# Altium PCB Layout.PcbDoc
Units mil, origin at the board's own origin, x right, y up, seen from the top; angles counter-clockwise.
Board outline 6225 x 3025 mil, 2 copper layers (Top Layer, Bottom Layer); 52 components, 49 nets, 203 pads, 6 vias.
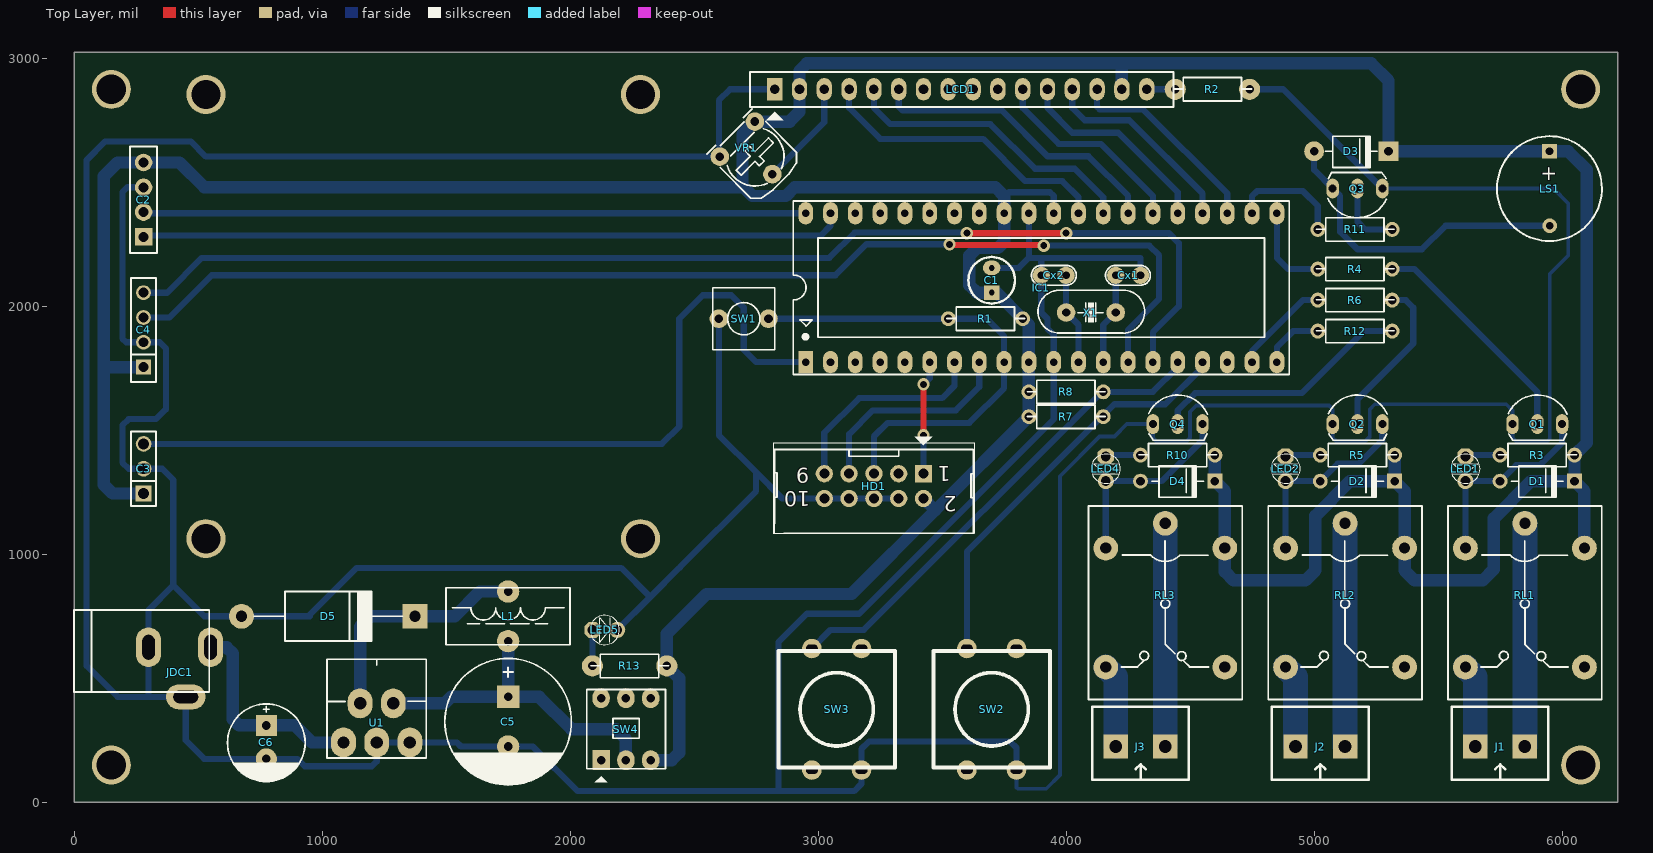
[diagram p0: Top Layer view]
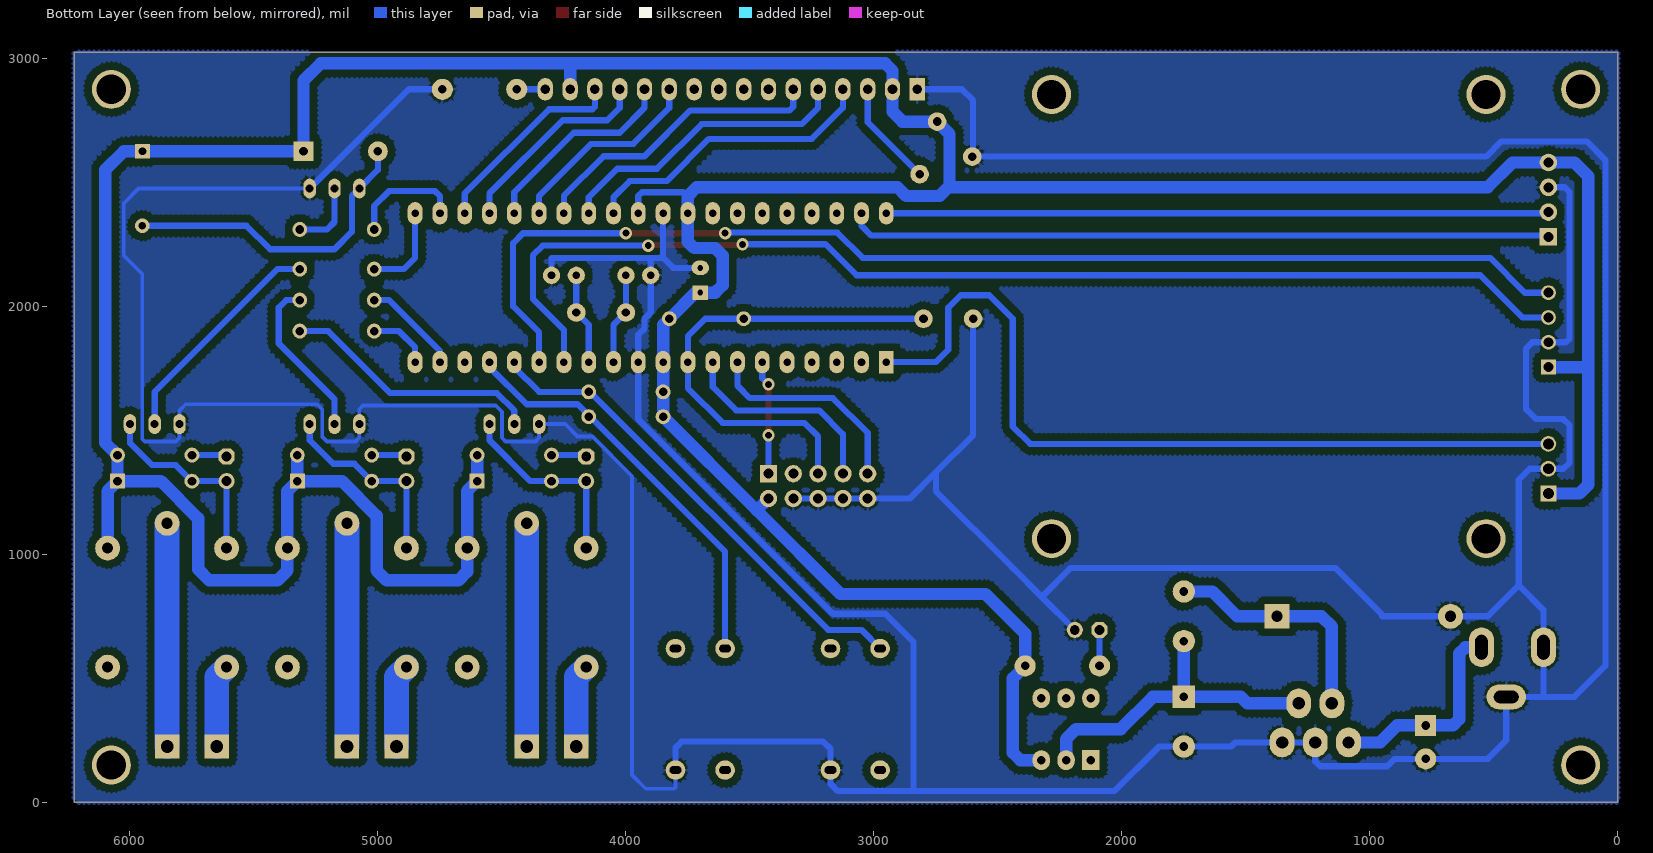
[diagram p1: Bottom Layer view, seen from below]
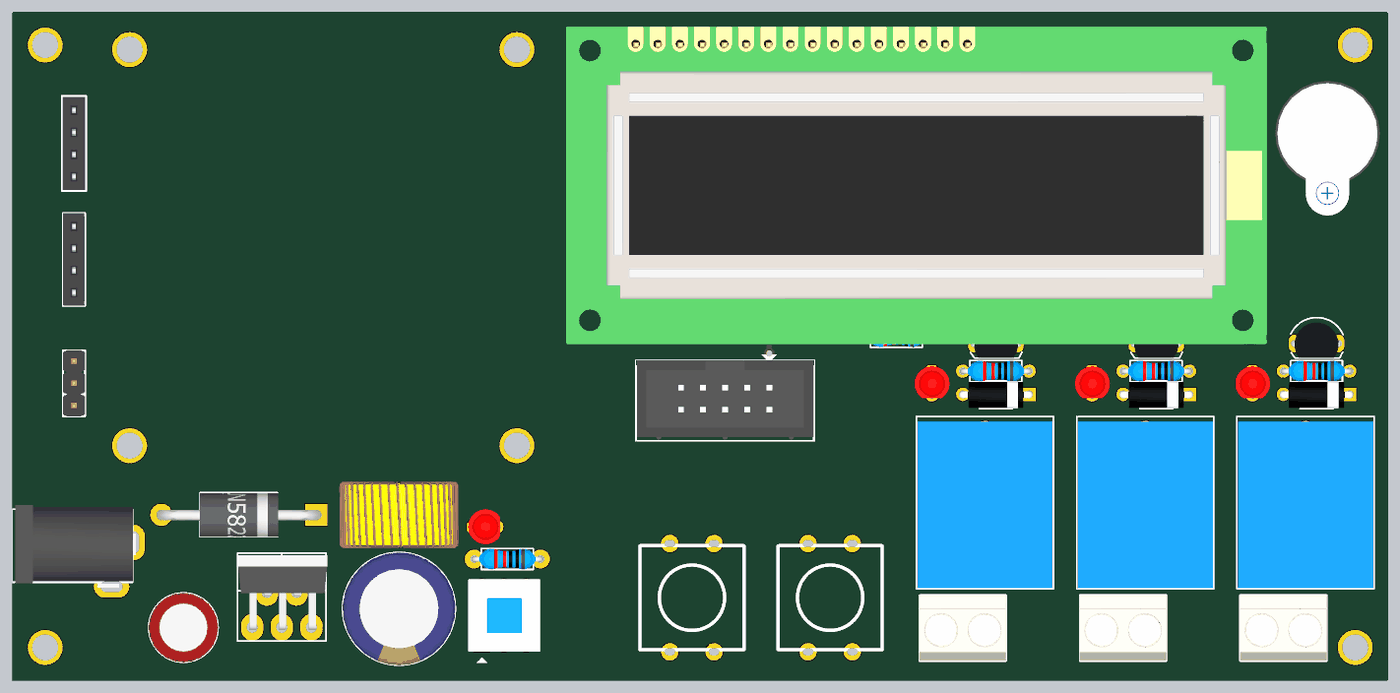
[diagram p2: 3D render of the assembled board from above, using the file's embedded part models]

## Layer stack, top to bottom
Top Solder: solder mask 0.4, Solder Resist, Dk 3.5
Top Layer: signal copper 1.4
Dielectric 1: dielectric 12.6, FR-4, Dk 4.8
Bottom Layer: signal copper 1.4
Bottom Solder: solder mask 0.4, Solder Resist, Dk 3.5

## Board outline
0,0 6225,0 6225,3025 0,3025

## Design rules (kind name [scope] priority, off if disabled: settings)
Clearance [All] p1: gap=30 ignorepadtopadclearanceinfootprint=FALSE
PolygonConnect [All] p1: connectstyle=Relief reliefconductorwidth=10 reliefentries=4 polygonreliefangle="90 Angle" airgapwidth=10
RoutingVias [All] p1: holewidth=28 width=50 viastyle="Through Hole" minholewidth=28 minwidth=50 maxholewidth=28 maxwidth=50
SolderMaskExpansion [All] p1: expansion=4
Width [All] p1: maxlimit=100 minlimit=15 preferedwidth=25
30 further rules are at their usual default settings.

## Components (designator, comment, footprint, x,y, rotation, side; value= is the part's Value field where it differs from the comment)
C1 "47u/16V" CA-ALU-2.54 3700,2105 r90 top value=104
C2 "MQ2-MOD" MQ2-MODULE 280,2430 r90 top
C3 "JP3" JP3-D1T 280,1245 r90 top
C4 "JP4" JP4-C1T 280,1755 r90 top
C5 "CP4" CE_12.5x20 1750,425 r270 top value=1000uF/25V
C6 "CP3" CE_8x12 775,310 r270 top value=100uF/50V
Cx1 "22pF" CN1 4250,2125 r180 top value=33pF
Cx2 "22pF" CN1 3950,2125 r0 top value=33pF
D1 "1N4007" DIO-1A-SMALL#1 5700,1295 r180 top
D2 "1N4007" DIO-1A-SMALL#1 4975,1295 r180 top
D3 "1N4007" DIO-1A-SMALL#2 4950,2625 r180 top
D4 "1N4007" DIO-1A-SMALL#1 4250,1295 r180 top
D5 "1N5822" D5A 1375,750 r180 top
HD1 "IDC 5x2" IDC10 3225,1270 r180 top value="Header 5x2"
IC1 "ATmega16A-PU" DIP40/W0.6 2950,1775 r0 top value="Atmega 16L"
J1 "KF2" KF2-5.08 5750,225 r180 top
J2 "KF2" KF2-5.08 5025,225 r180 top
J3 "KF2" KF2-5.08 4300,225 r180 top
JDC1 "Jac DC" DC0 425,525 r0 top
L1 "INDUCTOR" L 1750,850 r270 top
LCD1 "LCD 16x2A" LCD16X2N 2825,2875 r0 top value=LCD16x2A
LED1 "LED" LED-3MM-RED 5610,1395 r270 top value="LED 3 ly Single Colour"
LED2 "LED" LED-3MM-RED 4885,1395 r270 top value="LED 3 ly Single Colour"
LED4 "LED" LED-3MM-RED 4160,1395 r270 top value="LED 3 ly Single Colour"
LED5 "LED" LED-3MM-RED 2090,695 r0 top value="LED 3 - 5 ly 2 Colour"
LS1 "Speaker" SPEAKER 5949.5,2625 r270 top
Q1 "2N3904" TO92-123 5900,1525 r0 top value=C1815
Q2 "2N3904" TO92-123 5175,1525 r0 top value=C1815
Q3 "2N3904" TO92-123 5175,2475 r180 top value=C1815
Q4 "2N3904" TO92-123 4450,1525 r0 top value=C1815
R1 "10K" RES-1/4W-SMALL#1 3685,1950 r180 top
R2 "100" RES-1/4W-SMALL#2 4600,2875 r180 top
R3 "220" RES-1/4W-SMALL#1 5910,1400 r180 top value="R1/4W - 1K"
R4 "1k" RES-1/4W-SMALL#1 5175,2150 r180 top value="R1/4W - 1K"
R5 "220" RES-1/4W-SMALL#1 5185,1400 r180 top value="R1/4W - 1K"
R6 "1k" RES-1/4W-SMALL#1 5175,2025 r180 top value="R1/4W - 1K"
R7 "10K" RES-1/4W-SMALL#1 4010,1555 r180 top
R8 "10K" RES-1/4W-SMALL#1 4010,1655 r180 top
R10 "220" RES-1/4W-SMALL#1 4460,1400 r180 top value="R1/4W - 1K"
R11 "1k" RES-1/4W-SMALL#1 5175,2310 r180 top value="R1/4W - 1K"
R12 "1k" RES-1/4W-SMALL#1 5175,1900 r180 top value="R1/4W - 1K"
R13 "220" RES-1/4W-SMALL#2 2250,550 r180 top
RL1 "Relay 10A/12V" "RELAY 5" 5850,800 r270 top value="Relay SPDT, 10A, 12V"
RL2 "Relay 10A/12V" "RELAY 5" 5125,800 r270 top value="Relay SPDT, 10A, 12V"
RL3 "Relay 10A/12V" "RELAY 5" 4400,800 r270 top value="Relay SPDT, 10A, 12V"
SW1 "SW" SW2_6x6x6.5 2600,1950 r0 top value="SW chip 2 pin"
SW2 "SW" SW4-12x12x8 3700,375 r180 top value="Button chip 4 pin"
SW3 "SW" SW4-12x12x8 3075,375 r180 top value="Button chip 4 pin"
SW4 "Switch 3x2" SW3-DIP 2225,300 r90 top value="Switch 4x2"
U1 "LM2576" TO-220_5 1220,320 r0 top
VR1 "1K" VR-S2 2745,2745 r225 top value="Volume 50k"
X1 "8MHz" XT2 4100,1975 r0 top value=4Mhz

## Footprints (in the part's own frame and the unit in brackets; to place one, negate y for a bottom-side part, rotate by r counter-clockwise, add the part's x,y. Pads: shape width x height; smd on the part's side, far side on the other; paste and mask are expansions set on the pad)
CA-ALU-2.54 [mm]
  rect 1.5x1.58 hole 0.6: 1(-1.27,0)
  oval 1.5x1.8 hole 0.6: 2(1.27,0)
  silkscreen extent -2.39,-2.39 2.39,2.39, body extent -2,-2.03 1.99,1.97, height 7.01
CE_8x12 [mil]
  rect 85x85 hole 35: 1(0,0)
  round 85 hole 35: 2(135,0)
  silkscreen extent -87,-157 227,157, body extent -87,-157 227,157, height 477
CE_12.5x20 [mil]
  rect 90x90 hole 35: 1(0,0)
  round 90 hole 35: 2(200,0)
  silkscreen extent -155,-255 355,255, body extent -156,-255 354,255, height 866
CN1 [mil]
  round 70 hole 31: 1(-50,0) 2(50,0)
  silkscreen extent -90,-40 91,40, body extent -115,-33 115,33, height 265
D5A [mil]
  round 100 hole 45: 1(700,0)
  rect 100x100 hole 45: 2(0,0)
  silkscreen extent 50,-100 650,100, body extent -25,-98 722,100, height 199
DC0 [mil] "Jac DC input"
  oval 100x160 hole 50 slot 100 at 90 deg: 1(125,100) 2(-125,100)
  oval 160x100 hole 50 slot 100 at 0 deg: 3(25,-100)
  silkscreen extent -425,-80 120,250, body extent -410,-105 134,269, height 434
DIO-1A-SMALL#1 [mil] "Diode 1A, W 100mil, L 350mil"
  round 60 hole 35: 1(-50,0)
  rect 60x60 hole 35: 2(-350,0)
  silkscreen extent -305,-61 -95,65, body extent -366,-61 -34,65, height 122
DIO-1A-SMALL#2 [mil] "Diode 1A, W 100mil, L 350mil"
  round 80 hole 35: 1(-50,0)
  rect 80x80 hole 35: 2(-350,0)
  silkscreen extent -305,-61 -95,65, body extent -366,-61 -34,65, height 122
DIP40/W0.6 [mil] "40 PIN, W 600mil, Pin to pin 100mil"
  rect 60x90 hole 31: 1(0,0)
  oval 60x90 hole 31: 2(100,0) 3(200,0) 4(300,0) 5(400,0) 6(500,0) 7(600,0) 8(700,0) 9(800,0) 10(900,0) 11(1000,0) 12(1100,0) 13(1200,0) 14(1300,0) 15(1400,0) 16(1500,0) 17(1600,0) 18(1700,0) 19(1800,0) 20(1900,0) 21(1900,600) 22(1800,600) 23(1700,600) 24(1600,600) 25(1500,600) 26(1400,600) 27(1300,600) 28(1200,600) 29(1100,600) 30(1000,600) 31(900,600) 32(800,600) 33(700,600) 34(600,600) 35(500,600) 36(400,600) 37(300,600) 38(200,600) 39(100,600) 40(0,600)
  silkscreen extent -50,-50 1950,650, body extent -82,-10 1982,600, height 224
IDC10 [mil]
  rect 70x70 hole 40: 1(-200,-55)
  round 70 hole 40: 2(-200,45) 3(-100,-55) 4(-100,45) 5(0,-55) 6(0,45) 7(100,-55) 8(100,45) 9(200,-55) 10(200,45)
  silkscreen extent -405,-205 405,186, body extent -400,-178 400,180, height 366
JP3-D1T [mm] "3 pins, 1 row, straight, gold plating"
  rect 1.6x1.6 hole 1.1: 1(0,0)
  round 1.6 hole 1.1: 2(2.54,0) 3(5.08,0)
  silkscreen extent -1.27,-1.27 6.35,1.27, body extent -1.27,-1.27 6.35,1.27, height 8.54
JP4-C1T [mm] "4 row, straight, gold plating"
  rect 1.52x1.52 hole 1.02: 1(0,0)
  round 1.52 hole 1.02: 2(2.54,0) 3(5.08,0) 4(7.62,0)
  silkscreen extent -1.52,-1.27 9.14,1.27, body extent -1.52,-1.25 9.14,1.25, height 8.51
KF2-5.08 [mm]
  rect 2.5x2.5 hole 1.3: 1(-2.54,0) 2(2.54,0)
  silkscreen extent -4.95,-4.08 4.95,3.43, body extent -5,-4.07 5,3.43, height 10
L [mil]
  round 90 hole 35: 1(0,0) 2(200,0)
  silkscreen extent -15,-250 215,250, body extent -52,-270 252,270, height 570
LCD16X2N [mil] "LCD dipslay 16x2, 16 pin"
  rect 62x90 hole 39: 1(0,0)
  oval 62x90 hole 39: 2(100,0) 3(200,0) 4(300,0) 5(400,0) 6(500,0) 7(600,0) 8(700,0) 9(800,0) 10(900,0) 11(1000,0) 12(1100,0) 13(1200,0) 14(1300,0) 15(1400,0) 16(1500,0)
  silkscreen extent -100,-125 1608,70, body extent -320,-1353 2850,84, height 764
LED-3MM-RED [mil]
  oct 65x65 hole 40: 1(0,0)
  round 65 hole 40: 2(100,0)
  silkscreen extent -9,-59 109,59, body extent -27,-77 117,80, height 181
MQ2-MODULE [mm]
  rect 1.8x1.8 hole 1.02: 1(-3.81,0)
  round 1.8 hole 1.02: 2(-1.27,0) 3(1.27,0) 4(3.81,0)
  silkscreen extent -5.46,-1.4 5.46,1.4, body extent -10,-1.25 10,21.46, height 38
"RELAY 5" [mil] "Reley DPDT, 8 pin, 1A, W400mil, L800mil,H 300mil"
  round 100 hole 45: 1(-325,0) 2(255,240) 3(255,-240) 4(-225,-240) 5(-225,240)
  silkscreen extent -395,-310 385,310, body extent -371,-304 381,306, height 602
RES-1/4W-SMALL#1 [mil]
  round 60 hole 35: 1(-140,0) 2(160,0)
  silkscreen extent -148,-47 166,47, body extent -152,-47 172,47, height 97
RES-1/4W-SMALL#2 [mil]
  round 85 hole 35: 1(-140,0) 2(160,0)
  silkscreen extent -148,-47 166,47, body extent -152,-47 172,47, height 97
SPEAKER [mm]
  rect 1.5x1.5 hole 0.8: 1(0,0)
  round 1.5 hole 0.8: 2(7.62,0.013)
  silkscreen extent -1.55,-5.38 9.18,5.36, body extent -2.22,-6 13.24,6, height 4.5
SW2_6x6x6.5 [mil] "SW button 2pin, 250x 250 mil"
  round 75 hole 35: 1(0,0) 2(200,0)
  silkscreen extent -25,-125 225,125
SW3-DIP [mil] "SW DTDP - 6Pin 260x300x300 mil"
  rect 80x70 hole 35: 1(-130,100)
  oval 80x70 hole 35: 2(-130,0) 3(-130,-100) 4(120,-100) 5(120,0) 6(120,100)
  silkscreen extent -220,-160 155,158, body extent -163,-159 151,155, height 532
SW4-12x12x8 [mm]
  round 2 hole 0.8 slot 1.2 at 0 deg: 1(-2.54,6.223) 2(-2.54,-6.223) 3(2.54,-6.223) 4(2.54,6.223)
  silkscreen extent -5.97,-5.97 5.97,5.97, body extent -6,-6.93 6,6.93, height 8.5
TO92-123 [mil] "TO-92"
  oval 50x80 hole 32: 1(-100,0) 2(0,0) 3(100,0)
  silkscreen extent -117,-65 120,118, body extent -109,-66 109,95, height 245
TO-220_5 [mm]
  oval 2.54x3.048 hole 1.27: 1(-3.4,-2) 2(-1.7,2) 3(0,-2) 4(1.7,2) 5(3.4,-2)
  silkscreen extent -5.08,-3.61 5.08,6.53, body extent -4.99,-2.25 5.21,6.31, height 18.81
VR-S2 [mil] "Resistor Variable"
  round 75 hole 35: 1(0,0) 2(100,200) 3(200,0)
  silkscreen extent -31,-44 231,246, body extent -25,-43 231,243, height 293
XT2 [mil] "Footpin for Crystal 2 pin"
  round 75 hole 34: 1(-100,0) 2(100,0)
  silkscreen extent -213,-83 217,90, body extent -216,-87 216,90, height 144

## Part data
C1: library part CN-ALU-DIP, "Capacitor (Semiconductor SIM Model)", LatestRevisionDate=17-Jul-2002, LatestRevisionNote="Re-released for DXP Platform.", PackageReference=C1206, Publisher="Altium Limited"
C2: Manufacturer="Würth Elektronik eiSos GmbH", partNo=613004143121, ComponentLink1 Description=Manufacturer, ComponentLink1URL=http://www.we-online.com, ComponentLink2 Description=Datasheet, ComponentLink2URL=http://katalog.we-online.de/em/datasheet/6130xx143121.pdf, Created by="Karrer Zheng", Created Date="29 March 2013", NoPins=04
C3: "WR-PHD 2.54 mm Angled Socket Header", Manufacturer="Würth Elektronik eiSos GmbH", partNo=613003143121, ComponentLink1 Description=Manufacturer, ComponentLink1URL=http://www.we-online.com, ComponentLink2 Description=Datasheet, ComponentLink2URL=http://katalog.we-online.de/em/datasheet/6130xx143121.pdf, Created by="Karrer Zheng", Created Date="29 March 2013", NoPins=03
C4: "WR-PHD 2.54 mm Angled Socket Header", Manufacturer="Würth Elektronik eiSos GmbH", partNo=613004143121, ComponentLink1 Description=Manufacturer, ComponentLink1URL=http://www.we-online.com, ComponentLink2 Description=Datasheet, ComponentLink2URL=http://katalog.we-online.de/em/datasheet/6130xx143121.pdf, Created by="Karrer Zheng", Created Date="29 March 2013", NoPins=04
C5: "Cap P  1000uF/16V - 220uF/50V", Description 1="2200uF-3300uF/6,3V - 1000uF-2200uF/10V", Description 2="1000uF/16V - 470uF => 1000uF/25V - 100uF/100V", Description 3=330uF>470uF/35V_220uF>470uF/50V_10uF>22uF/250V, Description 4="220uF => 330uF/63V - 10uF =>33uF/160 - 200V", Description 5="4,7uF>10uF/250V_3,3uF>10uF/400V - 2,2uF>4,7uF/450V"
C6: "Cap P  470uF/16V - 100uF?35V", Description 1="1000uF/6,3V - 470uF/16V - 330uF - 25V", Description 2="220uF/35V - 100uF/50V - 63V - 4,7uF/200V", Description 3="22uF => 33uF100V - 3,3uF => 4,7uF/250V", Description 4="2,2uF =>3,3uF/350 - 2,2uF/400V - 1uF/450V"
Cx1 Cx2: library part CN
D1 D2 D3 D4: library part D1A, "Diode 1A"
HD1: library part "IDC 5X2"
IC1: "8-Bit AVR Microcontroller with 16K Bytes of In-System Programmable Flash Memory"
J1 J2 J3: Manufacturer="Würth Elektronik eiSos GmbH", partNo=691103110002, ComponentLink1 Description=Manufacturer, ComponentLink1URL=http://www.we-online.com, ComponentLink2 Description=Datasheet, ComponentLink2URL=http://katalog.we-online.de/em/datasheet/6911031100xx.pdf, Created by="Karrer Zheng", Created Date="29 October 2013", NoPins=2
JDC1: library part DCIN, "Jac DC input"
LCD1: library part LCD16x2A, "LCD dipslay 16 char, 2 line"
LED1 LED2 LED4: "LED Single colour Green and Red"
LED5: library part "LED SMD"
LS1: "Loudspeaker", LatestRevisionDate=17-Jul-2002, LatestRevisionNote="Re-released for DXP Platform.", PackageReference=PIN2, Published=24-Mar-1999, Publisher="Altium Limited"
Q1 Q2 Q3 Q4: library part 2N904, "NPN 600mW, ECB", =C2383
R1 R2 R7 R8 R13: library part Res-SMD, "Resistor", Manufacturer="Generic Components", Class=Passive, Published=08/06/2000, Publisher="Altium Hobart Technology Centre"
R3 R4 R5 R6 R10 R11 R12: library part R, "Resistor 1/4W"
RL1 RL2 RL3: library part "Relay 5", "Relay SPDT,10A - 12VDC 5 Pin", ="Relay SPDT, 10A, 24V"
SW1: library part SW2, "Switch button 2 pin"
SW2 SW3: library part SW4, "Switch button 4 pin"
SW4: library part SW3x2
U1: "3A Step-down Voltage Regulator"
VR1: library part VR-S, "Var Resistor"
X1: library part XT2, "Crystal, 32.768 KHz, -40 to 85 degC, 3.2 x 1.5 x 0.9 mm SMD"

## Free pads (board coordinates)
  round 157.48 hole 118.11: 2(150,2875) 3(6075,2875) 4(6075,150) 5(150,150) 6(531.5,2854.33) 7(2283.46,2854.33) 8(531.5,1062.99) 9(2283.46,1062.99)

## Via types
v1: diameter 50, hole 28, Top Layer to Bottom Layer, tented both sides, 6 vias

## Nets (pads, with @x,y where several pads share a name; then routed paths per layer and width w, separated by ;. In a path a pad name is that pad's centre, name@x,y a point inside that pad or via, vN(x,y) a via of type N, cw(c..) or ccw(c..) an arc to the next point about the centre after c; other vN are vias at no path point)
BUT1: IC1.16 R8.1 SW3.3 | length 1965.1
  Bottom Layer w25: SW3.3 3050,695 3185,695 4145,1655 R8.1 4350,1655 4450,1755 IC1.16
BUT2: IC1.17 R7.1 SW2.3 | length 1668.6
  Bottom Layer w25: SW2.3 3600,1010 4195,1605 4400,1605 4550,1755 IC1.17
BUZZ: IC1.22 R11.2 | length 463.1
  Bottom Layer w25: IC1.22 4750,2445 4770,2465 4955,2465 5015,2405 R11.2
D4: IC1.26 LCD1.11 | length 817
  Bottom Layer w25: LCD1.11 3825,2800 3970,2655 4140,2655 4350,2445 IC1.26
D5: IC1.25 LCD1.12 | length 825.8
  Bottom Layer w25: LCD1.12 3925,2800 4025,2700 4210,2700 4450,2460 IC1.25
D6: IC1.24 LCD1.13 | length 822.9
  Bottom Layer w25: LCD1.13 4025,2800 4075,2750 4255,2750 4550,2455 IC1.24
D7: IC1.23 LCD1.14 | length 820
  Bottom Layer w25: LCD1.14 4125,2805 4135,2795 4310,2795 4650,2455 IC1.23
EN: IC1.27 LCD1.6 | length 1214.1
  Bottom Layer w25: LCD1.6 3325,2805 3340,2790 3740,2790 3925,2605 4090,2605 4250,2445 IC1.27
GND: C1.2 C2.3 C3.2 C4.2 C5.2 C6.2 Cx1.1 Cx2.1 D5.1 HD1.4 HD1.6 HD1.8 HD1.10 IC1.11 IC1.31 JDC1.2 JDC1.3 LCD1.1 LED5.2 Q1.1 Q2.1 Q3.1 Q4.1 R2.1 SW1.1 SW2.1 SW3.1 U1.3 U1.5 VR1.3 | length 26643.8
  Bottom Layer w15: SW2.1 3800,60 3805,55 3920,55 3975,110 3975,1315 4135,1475 4195,1475 4245,1525 Q4.1 4350,1470 4365,1455 4485,1455 4500,1470 4500,1575 4525,1600 5060,1600 5075,1585 Q2.1 5075,1470 5090,1455 5205,1455 5225,1475 5225,1585 5245,1605 5775,1605 5800,1580 Q1.1 5800,1470 5815,1455 5940,1455 5950,1465 5950,2130 6025,2205 6025,2415 5965,2475 Q3.1
  Bottom Layer w25: C2.3 215,2480 195,2460 195,1870 210,1855 C4.2 345,1855 370,1830 370,1585 330,1545 220,1545 195,1520 195,1370 220,1345 C3.2 355,1345 400,1300 400,875 ; 950,750 945,750 ; LED5.2 2322.83,827.83 ; 2439.88,944.88 2322.83,827.83 ; 2445,950 2750,1255 2750,1330 ; SW1.1 2600,1480 2750,1330 ; VR1.3 VR1.3@2600,2603.58 ; LCD1.1 2645,2875 2600,2830 VR1.3@2600,2603.58 ; HD1.4 HD1.6 HD1.8 HD1.10 2855,1225 2750,1330 ; C1.2 3810,2155 3850,2195 ; SW2.1 3800,220 3775,245 3205,245 3175,215 SW3.1 3175,75 3145,45 2840,45 ; IC1.31 3850,2195 ; Cx1.1 4300,2195 3900,2195 ; R2.1 4875,2875 Q3.1 ; 300,425 JDC1.3 450,250 525,175 C6.2 900,175 930,145 1200,145 1220,165 U1.3 U1.5 1543.74,241.26 1560,225 C5.2 1850,225 2030,45 2840,45 ; 300,425 175,425 50,550 50,2590 125,2665 470,2665 531.42,2603.58 VR1.3@2600,2603.58 ; 300,425 JDC1.2 300,775 400,875 ; 400,875 525,750 D5.1 945,750 ; 945,750 1139.88,944.88 2205.79,944.88 2322.83,827.83 ; 2840,45 2840,645 2955,760 3165,760 3950,1545 IC1.11 3950,1885 3925,1910 3925,1950 3900,1975 Cx2.1 3900,2195 ; 3850,2195 3900,2195
IR_D: C3.3 IC1.1 | length 3384.8
  Bottom Layer w25: C3.3 2370,1445 2440,1515 2440,1950 2535,2045 2650,2045 2700,1995 2700,1825 2750,1775 IC1.1
MISO: HD1.9 IC1.7 | length 863.7
  Bottom Layer w25: HD1.9 3025,1490 3165,1630 3500,1630 3550,1680 IC1.7
MOSI: HD1.1 IC1.6 | length 460.4
  Top Layer w25: v1(3425,1480) v1(3425,1685)
  Bottom Layer w25: HD1.1 v1(3425,1480) ; v1(3425,1685) 3450,1710 IC1.6
MQ2_A: C2.1 IC1.39 | length 2847.8
  Bottom Layer w25: C2.1@275,2300 290,2285 3010,2285 3050,2325 IC1.39
MQ2_D: C2.2 IC1.40 | length 2685.4
  Bottom Layer w25: C2.2@275,2400 300,2375 IC1.40
NetC5_1: C5.1 L1.2 SW4.2 U1.4 | length 1329.4
  Bottom Layer w50: U1.4 1493.74,398.74 1520,425 C5.1 ; L1.2 C5.1 ; SW4.2 2225,255 2185,295 2005,295 1875,425 C5.1
NetC6_1: C6.1 JDC1.1 U1.1 | length 850.3
  Bottom Layer w50: JDC1.1 615,625 640,600 640,335 665,310 C6.1 890,310 958.74,241.26 U1.1
NetD1_1: D1.1 LED1.2 Q1.3 RL1.4 | length 799.2
  Bottom Layer w25: RL1.4 LED1.2 D1.1 5815,1360 5910,1360 6000,1450 Q1.3
NetD2_1: D2.1 LED2.2 Q2.3 RL2.4 | length 793.3
  Bottom Layer w25: RL2.4 LED2.2 D2.1 5095,1365 5180,1365 5275,1460 Q2.3
NetD3_1: D3.1 LS1.2 Q3.3 | length 1281.8
  Bottom Layer w25: D3.1 5000,2550 Q3.3 5105,2445 5105,2300 5175,2230 5435,2230 5530,2325 LS1.2
NetD4_1: D4.1 LED4.2 Q4.3 RL3.4 | length 793.3
  Bottom Layer w25: RL3.4 LED4.2 D4.1 4385,1295 4550,1460 Q4.3
NetD5_2: D5.2 L1.1 U1.2 | length 965
  Bottom Layer w50: U1.2 1153.07,708.07 1195,750 D5.2 1535,750 1635,850 L1.1
NetJ1_1: J1.1 RL1.1 | length 900
  Bottom Layer w100: J1.1 RL1.1
NetJ1_2: J1.2 RL1.3 | length 336.6
  Bottom Layer w100: RL1.3 5650,505 J1.2
NetJ2_1: J2.1 RL2.1 | length 900
  Bottom Layer w100: J2.1 RL2.1
NetJ2_2: J2.2 RL2.3 | length 336.6
  Bottom Layer w100: RL2.3 4925,505 J2.2
NetJ3_1: J3.1 RL3.1 | length 900
  Bottom Layer w100: J3.1 RL3.1
NetJ3_2: J3.2 RL3.3 | length 336.6
  Bottom Layer w100: RL3.3 4200,505 J3.2
NetLCD1_3: LCD1.3 VR1.2 | length 428.8
  Bottom Layer w25: VR1.2 3025,2742.16 LCD1.3
NetLCD1_16: LCD1.16 R2.2 | length 115
  Bottom Layer w25: LCD1.16 R2.2
NetLED1_1: LED1.1 R3.2 | length 140
  Bottom Layer w25: LED1.1@5610,1400 R3.2
NetLED2_1: LED2.1 R5.2 | length 140
  Bottom Layer w25: LED2.1@4885,1400 R5.2
NetLED4_1: LED4.1 R10.2 | length 150.4
  Bottom Layer w25: LED4.1@4160,1375 4185,1400 R10.2
NetLED5_1: LED5.1 R13.2 | length 145
  Bottom Layer w25: R13.2 LED5.1
NetQ1_2: Q1.2 R4.1 | length 920
  Bottom Layer w25: R4.1 5405,2150 5900,1655 Q1.2
NetQ2_2: Q2.2 R6.1 | length 660.6
  Bottom Layer w25: Q2.2 5175,1625 5400,1850 5400,1995 5370,2025 R6.1
NetQ3_2: Q3.2 R11.1 | length 287.4
  Bottom Layer w25: Q3.2 5175,2340 5205,2310 R11.1
NetQ4_2: Q4.2 R12.1 | length 1052.5
  Bottom Layer w25: Q4.2 4450,1580 4520,1650 4950,1650 5200,1900 R12.1
OSC1: Cx1.2 IC1.13 X1.2 | length 370.7
  Bottom Layer w25: IC1.13 4150,1925 X1.2 Cx1.2
OSC2: Cx2.2 IC1.12 X1.1 | length 370.7
  Bottom Layer w25: Cx2.2 X1.1 4050,1925 IC1.12
RL_DEN: IC1.19 R6.2 | length 394.9
  Bottom Layer w25: IC1.19 4750,1820 4955,2025 R6.2
RL_QTG: IC1.20 R12.2 | length 251.9
  Bottom Layer w25: IC1.20 4850,1835 4915,1900 R12.2
RL_QTR: IC1.21 R4.2 | length 363.6
  Bottom Layer w25: IC1.21 4850,2195 4895,2150 R4.2
RS: IC1.29 LCD1.4 | length 1214.1
  Bottom Layer w25: LCD1.4 3125,2800 3250,2675 3665,2675 3835,2505 3985,2505 4050,2440 IC1.29
RST: HD1.5 IC1.9 R1.2 SW1.2 | length 1944.8
  Bottom Layer w25: SW1.2 R1.2 3680,1950 3750,1880 IC1.9 3750,1670 3610,1530 3280,1530 3225,1475 HD1.5
RW: IC1.28 LCD1.5 | length 1214.1
  Bottom Layer w25: LCD1.5 3225,2800 3290,2735 3695,2735 3875,2555 4035,2555 4150,2440 IC1.28
RX: C4.4 IC1.15 | length 4816.5
  Top Layer w25: v1(3600,2295) v1(4000,2295)
  Bottom Layer w25: C4.4 375,2055 515,2195 3045,2195 3147.5,2297.5 3597.5,2297.5 v1(3600,2295) ; v1(4000,2295) 4415,2295 4455,2255 4455,2000 4350,1895 IC1.15
SCK: HD1.7 IC1.8 | length 863.7
  Bottom Layer w25: HD1.7 3125,1485 3220,1580 3555,1580 3650,1675 IC1.8
TX: C4.3 IC1.14 | length 4717.6
  Top Layer w25: v1(3530,2250) 3532.5,2247.5 3907.5,2247.5 v1(3910,2245)
  Bottom Layer w25: C4.3 385,1955 555,2125 3070,2125 3195,2250 v1(3530,2250) ; v1(3910,2245) 4335,2245 4375,2205 4375,2030 4250,1905 IC1.14
VCC: C1.1 C2.4 C3.1 C4.1 D1.2 D2.2 D3.2 D4.2 HD1.2 IC1.10 IC1.30 IC1.32 LCD1.2 LCD1.15 LS1.1 R1.1 R3.1 R5.1 R7.2 R8.2 R10.1 R13.1 RL1.5 RL2.5 RL3.5 SW4.3 VR1.1 | length 18046.3
  Bottom Layer w25: 3750,2440 3770,2460 3935,2460 3950,2445 IC1.30
  Bottom Layer w50: C3.1 155,1245 120,1280 120,1765 ; C4.1 130,1755 120,1765 ; SW4.3 2410,170 2440,200 2440,500 R13.1 2390,680 2550,840 3135,840 3472.5,1177.5 ; HD1.2 3472.5,1177.5 ; LCD1.15 4225,2980 ; R10.1 D4.2 4640,1255 RL3.5 4640,930 4675,895 4965,895 5005,935 5005,1155 5145,1295 D2.2@5305,1295 ; R5.1 D2.2 5365,1255 RL2.5 5365,935 5405,895 5680,895 5725,940 5725,1145 5875,1295 D1.2 ; RL1.5 6090,1255 D1.2 ; 120,1765 120,2525 175,2580 C2.4 425,2580 525,2480 2695,2480 2695,2485 ; 2695,2485 2695,2695 VR1.1 2885,2745 2925,2785 LCD1.2 2925,2950 2955,2980 4225,2980 ; 2695,2485 2735,2445 2870,2445 2905,2480 3715,2480 3750,2445 3750,2440 IC1.32 3750,2260 3725,2235 3640,2235 3610,2205 3610,2085 3640,2055 C1.1 3720,2055 R1.1 3850,1925 IC1.10 R7.2 3472.5,1177.5 ; 4225,2980 5230,2980 5300,2910 D3.2 LS1.1 6025,2625 6100,2550 6100,1450 R3.1 D1.2
pads on no net: HD1.3 IC1.2 IC1.3 IC1.4 IC1.5 IC1.18 IC1.33 IC1.34 IC1.35 IC1.36 IC1.37 IC1.38 LCD1.7 LCD1.8 LCD1.9 LCD1.10 RL1.2 RL2.2 RL3.2 SW2.2 SW2.4 SW3.2 SW3.4 SW4.1 SW4.4 SW4.5 SW4.6

## Polygon pours and split planes (outlines as drawn)
GND on Bottom Layer "GND" (hatched 90Degree grid 0 track 20, pour order 2): 0,3025 6225,3025 6225,0 0,0

## Silkscreen, mask and mechanical layers (free items; w line width, h text height)
Mechanical 1:
  lines w20: 0,0 0,3025 6225,3025 6225,0 0,0 ; 450,975 450,2943.5 2362.2,2943.5 2362.2,975 450,975

## Dimensions
6225,3025 to 6425,0 on Top Overlay
0,3025 to 6225,3025 on Top Overlay

## Text inside footprints (layer, text, board x,y; h text height)
HD1: Top Overlay "10" at 2969,1254 h60 r180; Top Overlay "9" at 2964,1349 h60 r180; Top Overlay "2" at 3560,1235 h60 r180; Top Overlay "1" at 3534.25,1354.53 h60 r180
LS1: Top Overlay "+" at 5921.5,2569.5 h60 r270